# Altium PCB 电动马扎pcb.PcbDoc
Units mm, origin at the board's own origin, x right, y up, seen from the top; angles counter-clockwise.
Board outline 99 x 55 mm, 2 copper layers (Top Layer, Bottom Layer); 128 components, 85 nets, 392 pads, 455 vias.
Unrouted connection lines stored in the file: 5.
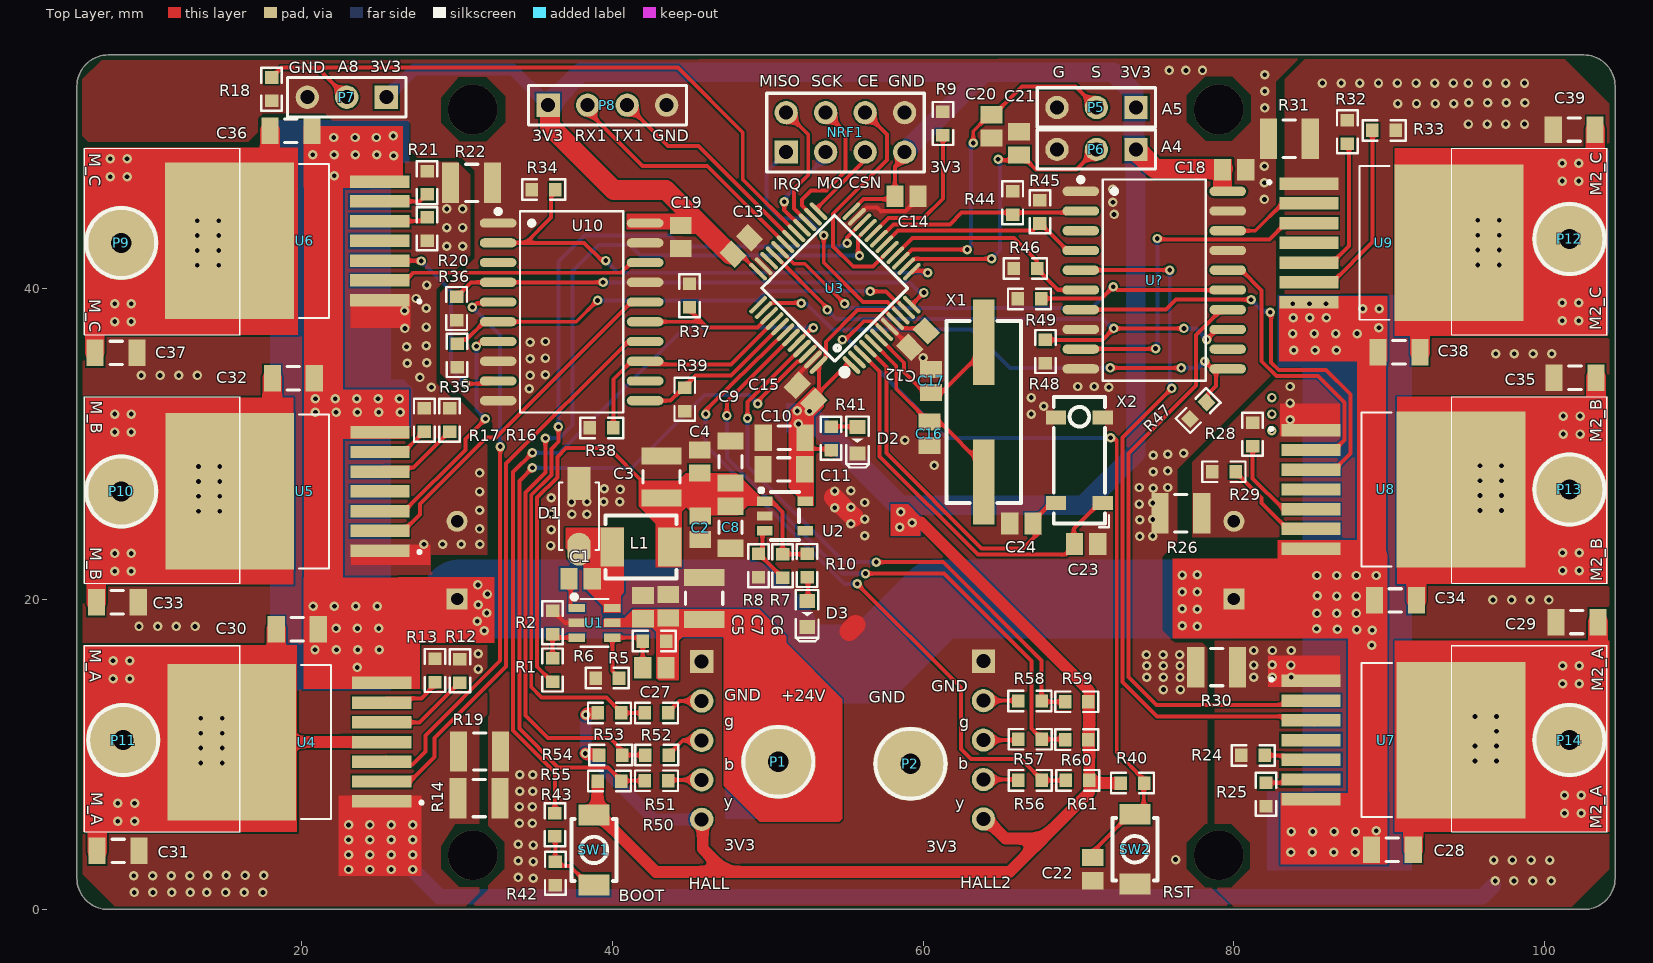
[diagram p0: Top Layer view]
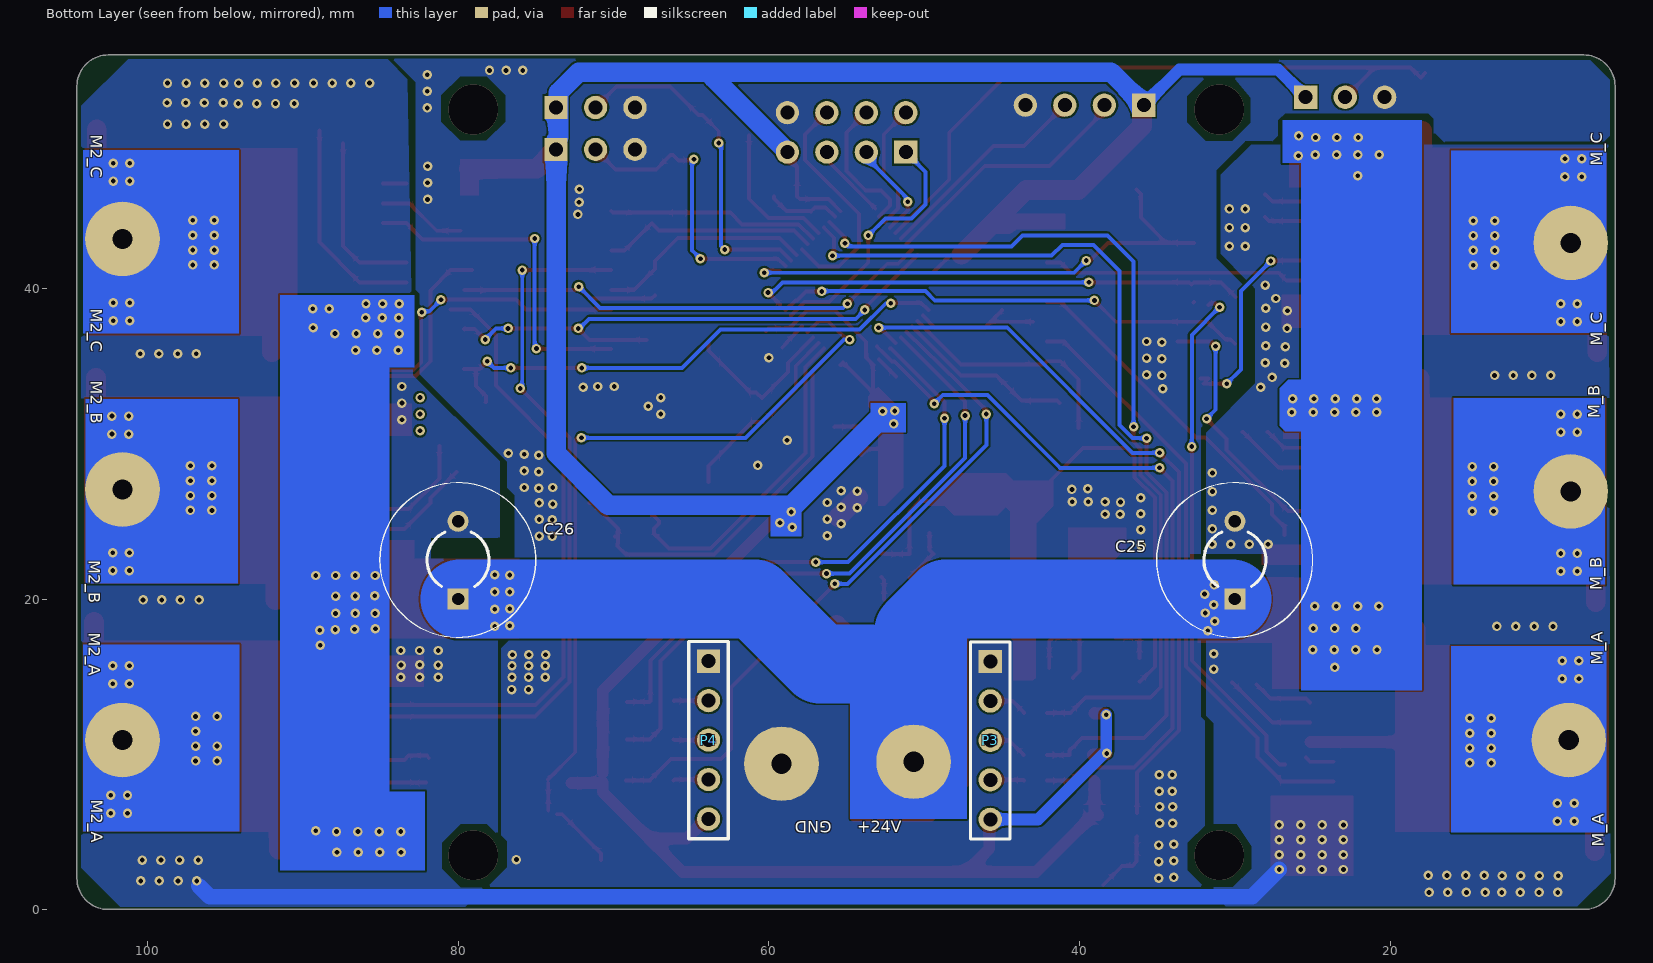
[diagram p1: Bottom Layer view, seen from below]

## Layer stack, top to bottom
Top Layer: signal copper 0.0356
Dielectric: dielectric 0.32, FR-4, Dk 4.8
Bottom Layer: signal copper 0.0356

## Board outline
5.532,2.02 ccw(c7.532,2.02) 7.532,0.02 102.532,0.02 ccw(c102.532,2.02) 104.532,2.02 104.532,53.02 ccw(c102.532,53.02) 102.532,55.02 7.532,55.02 ccw(c7.532,53.02) 5.532,53.02

## Design rules (kind name [scope] priority, off if disabled: settings)
Clearance [All] p1: gap=0.127
ComponentClearance [All] p1: gap=0 collisioncheckmode=3 verticalgap=0 showdistances=FALSE
PlaneConnect [All] p1: planeconnectstyle=Direct reliefexpansion=0.508 reliefentries=4 reliefconductorwidth=0.254 reliefairgap=0.254
PolygonConnect [All] p1: connectstyle=Direct reliefconductorwidth=0.254 reliefentries=4 polygonreliefangle="90 Angle"
RoutingVias [All] p1: holewidth=0.711 width=1.27 viastyle="Through Hole" minholewidth=0.711 minwidth=1.27 maxholewidth=0.711 maxwidth=1.27
SilkscreenOverComponentPads SilkToSolderMaskClearance [IsPad] p1: minsilkscreentomaskgap=0.254
SolderMaskExpansion [All] p1: expansion=0.102
Width [All] p1: maxlimit=7.62 minlimit=0.254 preferedwidth=0.254
25 further rules are at their usual default settings.

## Components (designator, comment, footprint, x,y, rotation, side; value= is the part's Value field where it differs from the comment)
C1 "" C0805 37.948,21.311 r180 top
C2 "" C0805 45.644,24.587 r270 top
C3 "" C1210 43.155,27.864 r270 top
C4 "" C0805 45.618,28.854 r270 top
C5 "" C0805 41.961,19.482 r90 top
C6 "" C1210 45.898,20.041 r270 top
C7 "" C0805 43.586,19.533 r270 top
C8 "" C1206 47.6,24.619 r90 top
C9 "" C1206 47.6,28.829 r270 top
C10 "" C1206 51.054,30.378 r0 top
C11 "" C1206 51.029,28.346 r0 top
C12 "10u" C0805 59.665,36.728 r45 top
C13 "0.1u" C0805 48.285,42.723 r225 top
C14 "0.1u" C0805 58.928,45.923 r180 top
C15 "0.1u" C0805 52.426,33.223 r315 top
C16 "Cap" C0805 60.401,30.632 r90 top
C17 "Cap" C0805 60.503,34.036 r270 top
C18 "0.1u" C0805 80.01,47.625 r180 top
C19 "0.1u" C0805 44.4,43.3 r90 top
C20 "" C0805 64.389,50.419 r90 top
C21 "" C0805 66.167,49.327 r270 top
C22 "" C0805 70.917,2.616 r90 top
C23 "Cap" C0805 70.485,23.546 r180 top
C24 "Cap" C0805 66.319,24.867 r0 top
C25 "Cap2" CAPR5-4X5 30,22.5 r90 bottom
C26 "Cap2" CAPR5-4X5 80,22.5 r90 bottom
C27 "" C0805 42.697,15.57 r180 top
C28 "" C1206 90.195,3.861 r180 top
C29 "" C1206 102.079,18.517 r0 top
C30 "" C1206 19.71,18.059 r0 top
C31 "" C1206 8.179,3.785 r180 top
C32 "" C1206 19.456,34.214 r0 top
C33 "" C1206 8.128,19.787 r180 top
C34 "" C1206 90.399,19.914 r180 top
C35 "" C1206 101.956,34.239 r0 top
C36 "" C1206 19.304,50.14 r0 top
C37 "" C1206 8.052,35.839 r180 top
C38 "" C1206 90.627,35.89 r180 top
C39 "" C1206 101.905,50.216 r0 top
D1 "Diode" SMA 37.846,25.324 r90 top
D2 "LED3" LED0603-GREEN 55.855,30.937 r270 top
D3 "LED3" LED0603-GREEN 52.611,19.762 r270 top
L1 "Inductor" 0420-4.7μH 39.99,23.343 r0 top
NRF1 "Header 4X2" HDR2X4 51.181,48.768 r0 top locked
P1 "P1_C4.5" P1_C4.5 50.673,9.525 r0 top
P2 "P1_C4.5" P1_C4.5 59.182,9.398 r0 top
P3 "Header 5" HDR1X5 45.745,15.977 r270 bottom
P4 "Header 5" HDR1X5 63.881,16.002 r270 bottom
P5 "Header 3" HDR1X3 73.692,51.638 r180 top
P6 "Header 3" HDR1X3 73.692,48.938 r180 top
P7 "Header 3" HDR1X3 25.44,52.3 r180 top
P8 "Header 4" HDR1X4 35.865,51.791 r0 top
P9 "P1_C4.5" P1_C4.5 8.382,42.926 r0 top
P10 "P1_C4.5" P1_C4.5 8.382,26.924 r0 top
P11 "P1_C4.5" P1_C4.5 8.509,10.922 r0 top
P12 "P1_C4.5" P1_C4.5 101.6,43.18 r0 top
P13 "P1_C4.5" P1_C4.5 101.6,27.051 r0 top
P14 "P1_C4.5" P1_C4.5 101.6,10.922 r0 top
R1 "" R0603 36.144,16.28 r270 top
R2 "" R0603 36.144,19.328 r270 top
R5 "" R0603 43.541,17.294 r180 top
R6 "" R0603 40.511,14.91 r180 top
R7 "" R0603 50.952,22.977 r270 top
R8 "" R0603 49.4,21.302 r90 top
R9 "" R0603 61.265,51.45 r270 top
R10 "" R0603 52.527,23.002 r270 top
R12 "" R0603 30.175,16.221 r270 top
R13 "" R0603 28.575,16.246 r270 top
R14 "" 14-1210 31.42,7.188 r0 top
R16 "" R0603 29.515,32.358 r270 top
R17 "" R0603 27.889,32.358 r270 top
R18 "" R0603 18.059,51.97 r90 top
R19 "" 14-1210 31.445,10.185 r0 top
R20 "" R0603 28.067,42.979 r90 top
R21 "" R0603 28.067,47.64 r270 top
R22 "" 14-1210 30.937,46.787 r0 top
R24 "" R0603 80.393,9.931 r0 top
R25 "" R0603 82.067,6.58 r90 top
R26 "" 14-1210 76.581,25.527 r180 top
R28 "" R0603 81.204,31.443 r270 top
R29 "" R0603 78.513,28.194 r0 top
R30 "" 14-1210 78.892,15.621 r180 top
R31 "" 14-1210 83.566,49.632 r180 top
R32 "" R0603 87.3,50.917 r270 top
R33 "" R0603 90.516,50.165 r180 top
R34 "" R0603 36.414,46.355 r180 top
R35 "" R0603 29.997,36.523 r270 top
R36 "" R0603 29.972,39.546 r270 top
R37 "" R0603 44.958,38.686 r90 top
R38 "" R0603 38.457,31.013 r0 top
R39 "" R0603 44.653,32.006 r90 top
R40 "" R0603 74.319,8.153 r180 top
R41 "" R0603 54.077,29.499 r90 top
R42 "" R0603 36.322,1.5 r90 top
R43 "" R0603 36.297,6.315 r270 top
R44 "" R0603 65.761,44.655 r90 top
R45 "" R0603 67.513,44.079 r90 top
R46 "" R0603 67.427,41.275 r180 top
R47 "" R0603 77.102,31.534 r45 top
R48 "" R0603 67.869,35.087 r90 top
R49 "" R0603 67.689,39.319 r180 top
R50 "" R0603 43.678,8.306 r180 top
R51 "" R0603 43.703,9.957 r180 top
R52 "" R0603 43.678,12.675 r180 top
R53 "" R0603 38.965,12.675 r0 top
R54 "" R0603 39.042,9.957 r0 top
R55 "" R0603 38.965,8.28 r0 top
R56 "" R0603 66.042,8.331 r0 top
R57 "" R0603 66.042,10.973 r0 top
R58 "" R0603 66.025,13.437 r0 top
R59 "" R0603 70.729,13.386 r180 top
R60 "" R0603 70.729,10.947 r180 top
R61 "" R0603 70.788,8.331 r180 top
SW1 "" SW-SMD_L3.9-W3.0-P4.45 38.853,1.687 r90 top
SW2 "" SW-SMD_L3.9-W3.0-P4.45 73.688,1.734 r90 top
U1 "TPMP2359DJ" MP2359 37.694,19.416 r270 top
U2 "RT9013-33GB" SOP23-5_L3.0_W1.7_P0.95_LS2.8_BR 49.787,26.26 r0 top
U3 "STM32F103C8T6" STM32F103C8T6 55.442,35.002 r45 top
U4 "BTS7960B" PG-TO263-7-1 25.1,7.042 r180 top
U5 "*" PG-TO263-7-1 24.973,23.171 r180 top
U6 "*" PG-TO263-7-1 24.965,39.3 r180 top
U7 "BTS7960B" PG-TO263-7-1 85.017,14.675 r0 top
U8 "*" PG-TO263-7-1 85.009,30.804 r0 top
U9 "*" PG-TO263-7-1 84.882,46.679 r0 top
U10 "SN74HC244DW" SOIC-20_L13.0-W7.6-P1.27-LS10.3-BL 32.606,44.126 r0 top
U? "SN74HC244DW" SOIC-20_L13.0-W7.6-P1.27-LS10.3-BL 70.111,46.175 r0 top
X1 "8MHz" HC-49S-SMD 63.754,36.449 r270 top
X2 "FR08S4-32.768-N06LLDT" OSC-SMD_4P-L8.0-W3.2-BL 71.563,26.203 r90 top

## Footprints (in the part's own frame and the unit in brackets; to place one, negate y for a bottom-side part, rotate by r counter-clockwise, add the part's x,y. Pads: shape width x height; smd on the part's side, far side on the other; paste and mask are expansions set on the pad)
14-1210 [mm] "Chip Resistor, Body 3.2x2.5mm, IPC High Density"
  rect 1.1x2.6 smd: 1(-1.35,0) 2(1.35,0)
  silkscreen extent -0.4,-1.2 0.4,1.2, body extent -1.68,-1.32 1.68,1.32, height 0.9
0420-4.7μH [mm]
  rect 1.501x2.499 smd mask+0.05: 1(0,0) 2(3.698,0)
  silkscreen extent -0.44,-2.03 4.14,2.03
C0805 [mm] "Chip Capacitor, Body 2.0x1.3mm, IPC High Density"
  rect 1.1x1.4 smd: 1(-0.75,0) 2(0.75,0)
  body extent -1.1,-0.72 1.1,0.72, height 1.4
C1206 [mm] "Chip Capacitor, Body 3.2x1.6mm, IPC High Density"
  rect 1.1x1.7 smd: 1(-1.35,0) 2(1.35,0)
  silkscreen extent -0.4,-0.75 0.4,0.75, body extent -1.7,-0.9 1.7,0.9, height 1.3
C1210 [mm] "Chip Capacitor, Body 3.2x2.5mm, IPC High Density"
  rect 1.1x2.6 smd: 1(-1.35,0) 2(1.35,0)
  silkscreen extent -0.4,-1.2 0.4,1.2, body extent -1.7,-1.35 1.7,1.35, height 1.3
CAPR5-4X5 [mm] "Capacitor; 2 Leads"
  rect 1.35x1.35 hole 0.8: 1(-2.5,0)
  round 1.35 hole 0.8: 2(2.5,0)
  silkscreen extent -1.69,-2 1.82,2
HC-49S-SMD [mm] "8Mhz晶振"
  rect 5.5x1.4 smd mask+0.051: 1(-0.083,0.14) 2(8.917,0.14)
  silkscreen extent -1.43,-2.26 10.27,2.54
HDR1X3 [mm] "Connector; Header; 3 Position"
  rect 1.5x1.5 hole 0.9: 1(0,0)
  round 1.5 hole 0.9: 2(2.54,0) 3(5.08,0)
  silkscreen extent -1.27,-1.27 6.35,1.27
HDR1X4 [mm] "Connector; Header; 4 Position"
  rect 1.5x1.5 hole 0.9: 1(0,0)
  round 1.5 hole 0.9: 2(2.54,0) 3(5.08,0) 4(7.62,0)
  silkscreen extent -1.27,-1.27 8.89,1.27
HDR1X5 [mm] "Connector; Header; 5 Position"
  rect 1.5x1.5 hole 0.9: 1(0,0)
  round 1.5 hole 0.9: 2(2.54,0) 3(5.08,0) 4(7.62,0) 5(10.16,0)
  silkscreen extent -1.27,-1.27 11.43,1.27
HDR2X4 [mm] "Connector; Header; 4x2 Position"
  rect 1.5x1.5 hole 0.9: 1(0,0)
  round 1.5 hole 0.9: 2(0,2.54) 3(2.54,0) 4(2.54,2.54) 5(5.08,0) 6(5.08,2.54) 7(7.62,0) 8(7.62,2.54)
  silkscreen extent -1.27,-1.27 8.89,3.81
LED0603-GREEN [mm] "SMT LED; 2 Flat Leads"
  rect 0.9x1 smd: 1(-0.124,-0.084) 2(1.576,-0.084)
  silkscreen extent -0.81,-0.81 2.48,0.65
MP2359 [mm] "SOT23-6"
  rect 0.532x1.072 smd mask+0.051: 1(0,0) 2(0.95,0) 3(1.9,0) 4(1.9,2.298) 5(0.95,2.298) 6(0,2.298)
  silkscreen extent -0.87,-0.3 2.49,2.04
OSC-SMD_4P-L8.0-W3.2-BL [mm] "32.769khz"
  rect 0.9x1.3 smd mask+0.051: 1(-0.016,0.008) 2(5.484,0.008) 3(5.484,3.008) 4(-0.016,3.008)
  silkscreen extent -1.58,-0.4 6.8,3.16
P1_C4.5 [mm]
  round 4.8 hole 1.3: 0(0,0)
  silkscreen extent -2.25,-2.25 2.25,2.25
PG-TO263-7-1 [mm] "BTS7960B"
  rect 3.81x0.8 smd: 1(-0.054,0.057) 2(-0.054,-1.213) 3(-0.054,-2.483) 4(-0.054,-3.753) 5(-0.054,-5.023) 6(-0.054,-6.293) 7(-0.054,-7.563)
  rect 8.29x10.07 smd paste-4.36: 8(9.606,-3.753)
  silkscreen extent -2.7,-8.7 5.15,1.2, body extent -1.55,-8.7 13.35,1.2, height 4.4
R0603 [mm]
  rect 0.806x0.864 smd mask+0.051: 1(0.092,0) 2(1.598,0)
  silkscreen extent -0.54,-0.66 2.23,0.66
SMA [mm]
  rect 2.12x1.5 smd: 1(2.115,0)
  oval 2.12x1.5 smd: 2(-2.115,0)
  silkscreen extent -2.16,-1.28 2.16,1.28
SOIC-20_L13.0-W7.6-P1.27-LS10.3-BL [mm] "74HC244DW"
  oval 2.36x0.595 smd mask+0.051: 1(0.033,0.07) 2(0.033,-1.2) 3(0.033,-2.47) 4(0.033,-3.74) 5(0.033,-5.01) 6(0.033,-6.28) 7(0.033,-7.55) 8(0.033,-8.82) 9(0.033,-10.09) 10(0.033,-11.36) 11(9.492,-11.36) 12(9.492,-10.09) 13(9.492,-8.82) 14(9.492,-7.55) 15(9.492,-6.28) 16(9.492,-5.01) 17(9.492,-3.74) 18(9.492,-2.47) 19(9.492,-1.2) 20(9.492,0.07)
  silkscreen extent -0.12,-12.12 8.08,0.97
SOP23-5_L3.0_W1.7_P0.95_LS2.8_BR [mm] "RT9013"
  rect 1x0.6 smd mask+0.051: 1(0.013,0.04) 2(0.013,-0.91) 3(0.013,-1.86) 4(2.613,-1.86) 5(2.613,0.04)
  silkscreen extent -0.34,-2.46 2.21,0.87
STM32F103C8T6 [mm]
  oval 0.27x1.5 smd mask+0.05: 1(0,0.085) 2(0.5,0.085) 3(1,0.085) 4(1.5,0.085) 5(2,0.085) 6(2.5,0.085) 7(3,0.085) 8(3.5,0.085) 9(4,0.085) 10(4.5,0.085) 11(5,0.085) 12(5.5,0.085) 25(5.5,8.585) 26(5,8.585) 27(4.5,8.585) 28(4,8.585) 29(3.5,8.585) 30(3,8.585) 31(2.5,8.585) 32(2,8.585) 33(1.5,8.585) 34(1,8.585) 35(0.5,8.585) 36(0,8.585)
  oval 1.5x0.27 smd mask+0.05: 13(7,1.585) 14(7,2.085) 15(7,2.585) 16(7,3.085) 17(7,3.585) 18(7,4.085) 19(7,4.585) 20(7,5.085) 21(7,5.585) 22(7,6.085) 23(7,6.585) 24(7,7.085) 37(-1.5,7.085) 38(-1.5,6.585) 39(-1.5,6.085) 40(-1.5,5.585) 41(-1.5,5.085) 42(-1.5,4.585) 43(-1.5,4.085) 44(-1.5,3.585) 45(-1.5,3.085) 46(-1.5,2.585) 47(-1.5,2.085) 48(-1.5,1.585)
  silkscreen extent -0.84,-0.12 6.05,7.68
SW-SMD_L3.9-W3.0-P4.45 [mm]
  rect 1.35x2 smd: 1(-0.087,0.053) 2(4.413,0.053)
  silkscreen extent 0.16,-1.4 4.16,1.5

## Part data
C1 C2 C3 C4 C5 C6 C7 C8 C9 C10 C11 C20 C21 C22 C27 C28 C29 C30 C31 C32 C33 C34 C35 C36 C37 C38 C39: library part Cap, "Capacitor"
C16 C17 C23 C24 C25 C26: "Capacitor"
D1: "Default Diode"
D2 D3: "Typical BLUE SiC LED"
NRF1: "Header, 4-Pin, Dual row"
P3 P4: "Header, 5-Pin"
P5 P6 P7: "Header, 3-Pin"
P8: "Header, 4-Pin"
R1 R2 R5 R6 R12 R13 R14 R16 R17 R19 R20 R21 R22 R24 R25 R26 R28 R29 R30 R31 R32 R33 R34 R35 R36 R37 R38 R39 R44 R45 R46 R47 R48 R49 R50 R51 R52 R53 R54 R55 R56 R57 R58 R59 R60 R61: library part Res1, "Resistor"
R7 R8 R9 R10 R18 R40 R41 R42 R43: library part Res2, "Resistor"
SW1 SW2: library part TAEF-25R-V-T/R
U4 U7: "Half Bridge Driver DC Motors, General Purpose DMOS PG-TO263-7-1"
U5 U6 U8 U9: library part BTS7960B, "Half Bridge Driver DC Motors, General Purpose DMOS PG-TO263-7-1"

## Via types
v1: diameter 0.61, hole 0.305, Top Layer to Bottom Layer, 451 vias
v2: diameter 3.2, hole 3.2, Top Layer to Bottom Layer, 4 vias

## Nets (pads, with @x,y where several pads share a name; then routed paths per layer and width w, separated by ;. In a path a pad name is that pad's centre, name@x,y a point inside that pad or via, vN(x,y) a via of type N, cw(c..) or ccw(c..) an arc to the next point about the centre after c; other vN are vias at no path point)
3V3: C10.2 C11.2 C12.2 C13.2 C14.2 C15.2 C18.2 C19.2 NRF1.7 P3.5 P4.5 P5.1 P6.1 P7.1 P8.1 R40.2 R41.1 R53.1 R54.1 R55.1 R59.1 R60.1 R61.1 SW1.2 U2.5 U3.1 U3.9 U3.24 U3.36 U3.48 U10.20 U?.20 | length 254.1
  Top Layer w0.254: U10.20 C19.2@43.704,44.196 ; C19.2@44.081,44.219 44.25,44.05 44.3,44.05 C19.2 ; C13.2@47.603,42.015 C13.2@47.709,41.909 ; C13.2@48.321,42.123 U3.36 ; 52.2,26.881 52.2,27.3 ; C10.2 52.404,30.078 52.827,29.655 53.653,29.655 54.048,29.261 R41.1@54.077,29.261 ; C15.2@52.904,33.27 C15.2@53.01,33.376 ; U3.1 55.23,35.215 53.301,33.286 53.301,35.102 U3.48 53.261,35.066 53.731,35.537 53.731,36.561 55.77,38.6 57.501,38.6 U3.9 58.681,37.42 60.033,37.42 C12.2 ; U3.24 56.163,45.742 57.997,45.742 C14.2 58.178,47.808 58.801,48.431 NRF1.7
  Top Layer w0.762: v1(38.252,10.058) 38.303,10.008 39.111,10.008 39.133,9.986 R54.1 ; v1(38.278,12.548) 38.354,12.624 39.035,12.624 39.057,12.646 R53.1 ; R55.1 39.035,8.258 39.035,6.335 SW1.2 39.125,6.1 42.787,2.438 47.295,2.438 ; C19.2@44.081,44.219 44.231,44.219 C19.2@44.3,44.15 ; C19.2@44.3,44.05 C19.2@44.3,44.15 ; P3.5 45.81,5.752 45.81,3.924 47.295,2.438 ; 46.485,43.152 46.485,43.279 ; C13.2@47.603,42.015 45.736,43.881 44.569,43.881 C19.2 C19.2@44.3,44.15 ; v1@58.7,24.5 59.117,24.917 v1(59.284,24.917) 59.868,24.917 70.688,14.097 70.688,8.81 ; P4.5 64.044,5.842 65.301,4.585 67.704,4.585 ; R40.2 70.739,8.153 70.688,8.204 70.688,7.569 67.704,4.585 ; 47.295,2.438 65.557,2.438 67.704,4.585
  Top Layer w1.27: P8.1 35.98,51.676 35.98,50.431 40.081,46.33 43.434,46.33 46.485,43.279 C13.2@47.603,42.161 ; P6.1 74.929,47.701 C18.2@79.305,47.701
  Bottom Layer w0.762: P7.1 27.217,54.077 33.579,54.077 P8.1 ; v1(38.278,12.548) 38.278,10.211 42.672,5.817 P3.5 ; v1(51.892,32.106) 58.395,25.603 v1(58.56,25.603) ; 73.54,52.4 73.54,52.6
  Bottom Layer w1.016: v1(52.68,32.08) 58.725,26.035
  Bottom Layer w1.27: P8.1 37.986,53.912 72.228,53.912 73.54,52.6 ; 58.725,26.035 70.333,26.035 73.685,29.388 73.685,49.555 73.54,49.7 73.54,52.4 ; NRF1.7 63.566,53.533
  other v1: 58.496,24.613 51.968,31.267
3V5: C2.1 C3.2 C4.2 C8.2 C9.2 L1.2 R1.2 R7.1 R10.1 U2.1 | length 30.3
  Top Layer w0.254: R1.2 36.115,14.681 35.154,15.643 35.154,26.532 36.449,27.828 36.449,29.144 37.023,29.718 39.776,29.718 41.982,27.513 41.982,26.937 42.405,26.514 C3.2 ; 49.3,26.3 U2.1@49.5,26.3 ; U2.1 50.256,26.3 50.952,25.603 R7.1 52.502,22.885 R10.1 ; R10.1@52.443,22.919 R10.1@52.756,22.919
A4: C21.2 P6.2 U3.14 | length 19.8
  Top Layer w0.254: U3.14 59.392,41.9 v1(64.4,41.9) ; v1(64.821,48.311) 64.897,48.235 65.825,48.235 C21.2 66.317,48.577 67.243,47.65 69.865,47.65 P6.2
  Bottom Layer w0.254: v1(64.4,41.9) 64.948,42.448 64.948,48.184 v1(64.821,48.311)
A5: C20.2 P5.2 U3.15 | length 22
  Top Layer w0.254: U3.15 59.279,42.494 v1(62.84,42.494) ; v1(63.221,49.352) 63.221,50.11 64.28,51.169 C20.2 64.539,51.169 66.354,52.984 69.806,52.984 P5.2
  Bottom Layer w0.254: v1(62.84,42.494) 63.068,42.723 63.068,49.2 v1(63.221,49.352)
A8: P7.2 R18.2 U3.29 | length 43.4
  Top Layer w0.254: R18.2@17.754,53.874 17.754,53.845 18.031,53.569 R18.2 18.691,54.2 20.98,54.2 ; P7.2 22.88,52.3 20.98,54.2 ; U3.29 48.387,47.007 48.387,50.038 44.225,54.2 20.98,54.2
BOOT0: R43.1 U3.44 | length 47.7
  Top Layer w0.254: v1(34.849,29.413) 33.599,28.164 33.599,11.531 36.297,8.834 R43.1 ; U3.44 52.835,37.465 v1(52.934,37.465)
  Bottom Layer w0.254: v1(34.849,29.413) 36.601,29.413 44.653,37.465 v1(52.934,37.465)
BOOT1: R9.2 U3.20 | length 9.5
  Top Layer w0.254: U3.20 57.775,44.526 60.026,44.526 61.265,45.765 R9.2
CE: NRF1.6 U3.17 | length 15.3
  Top Layer w0.254: NRF1.6 57.658,49.911 57.658,48.258 54.2,44.8 54.2,42.7 55.5,41.4 56.766,41.4 57.853,42.487 U3.17
CSN: NRF1.5 U3.25 | length 4.9
  Top Layer w0.254: U3.25@53.149,45.148 56.023,48.022 56.023,48.53 NRF1.5
GND: C2.2 C3.1 C4.1 C5.2 C6.1 C7.1 C8.1 C9.1 C10.1 C11.1 C12.1 C13.1 C14.1 C15.1 C16.1 C17.1 C18.1 C19.1 C20.1 C21.1 C22.1 C23.1 C24.1 D1.1 D2.2 D3.2 NRF1.8 P2.0 P3.1 P4.1 P5.3 P6.3 P7.3 P8.4 R2.1 R6.2 R8.1 R9.1 R14.2 R18.1 R19.2 R22.2 R26.2 R30.2 R31.2 R34.2 R35.2 R36.2 R37.2 R38.1 R39.1 R42.1 R44.2 R45.2 R46.2 R47.1 R48.1 R49.2 SW2.1 U1.2 U2.2 U3.8 U3.23 U3.35 U3.47 U10.1 U10.8 U10.10 U10.17 U10.19 U?.1 U?.8 U?.10 U?.17 U?.19 X2.2 X2.3 | length 12.4
  Top Layer w0.254: R2.1 36.173,19.236 36.943,18.466 U1.2 ; C15.1@51.822,34.33 U3.47 ; U3.23 55.74,44.608 56.344,45.212 57.023,45.212 57.277,44.958 57.288,44.969 58.874,44.969 59.678,45.773 C14.1 ; U3.8 57.857,37.533 58.833,36.557 58.833,36.5 C12.1
  Top Layer w1.27: 54.25,26.547 55.525,25.273 ; 55.238,17.932 55.643,18.338
  other v1: 34.9,2.032 33.934,2.083 34.9,3.099 33.934,3.15 76.244,3.231 34.9,4.166 33.934,4.216 34.011,5.563 34.849,5.563 34.011,6.629 34.849,6.629 34.036,7.62 34.874,7.62 34.036,8.687 34.874,8.687 75.463,14.173 76.556,14.173 74.397,14.961 75.463,14.961 76.53,14.961 74.397,15.697 75.463,15.697 76.53,15.697 74.371,16.408 75.438,16.408 76.505,16.408 36.017,23.444 73.939,24.028 74.778,24.054 56.236,24.079 36.068,24.469 55.347,24.841 73.939,25.095 74.778,25.121 56.236,25.146 37.389,25.451 38.354,25.451 36.068,25.493 54.305,25.883 55.347,25.908 73.914,26.111 74.778,26.187 56.236,26.213 37.363,26.238 38.354,26.264 39.438,26.264 40.462,26.264 36.068,26.518 54.305,26.949 55.347,26.975 40.488,27.051 39.463,27.102 74.803,27.127 73.914,27.178 75.743,27.178 74.803,28.194 75.743,28.245 60.706,28.6 74.803,29.261 75.743,29.312 76.759,29.388 58.826,30.226 66.954,31.902 67.767,32.41 66.954,32.969 34.646,33.528 71.958,33.63 69.952,33.68 71.018,33.68 34.696,34.392 35.687,34.442 34.696,35.458 35.687,35.509 59.995,35.535 34.696,36.525 35.687,36.576 72.288,44.755 72.212,45.542 81.966,45.72 72.187,46.38 81.966,46.787 81.966,47.854 81.991,51.613 81.991,52.68 81.991,53.746 75.844,54.026 76.911,54.026 77.978,54.026
hall2_b: R57.2 R60.2 U3.43 | length 41.3
  Top Layer w0.254: v1(47.366,31.811) 47.366,32.703 U3.43 ; v1(56.286,21.641) 61.341,21.641 66.966,16.016 66.966,11.676 67.64,11.002 R57.2 69.105,10.973 R60.2
  Bottom Layer w0.254: v1(47.366,31.811) 47.366,29.088 54.813,21.641 v1(56.286,21.641)
hall2_g: R58.2 R59.2 U3.45 | length 37.3
  Top Layer w0.254: v1(48.691,31.632) 48.691,32.692 52.122,36.123 U3.45 ; v1(56.972,22.377) 61.29,22.377 67.623,16.045 R58.2 67.674,13.386 R59.2
  Bottom Layer w0.254: v1(48.691,31.632) 48.691,28.575 54.889,22.377 v1(56.972,22.377)
hall2_y: R56.2 R61.2 U3.42 | length 43.9
  Top Layer w0.254: v1(45.999,31.908) 45.999,32.143 47.8,33.944 U3.42 ; v1(55.753,20.98) 62.433,14.3 62.433,10.338 63.068,9.703 66.297,9.703 67.64,8.36 R56.2 R61.2
  Bottom Layer w0.254: v1(45.999,31.908) 45.999,29.916 54.935,20.98 v1(55.753,20.98)
hall_b: R51.2 R54.2 U3.21 | length 60.9
  Top Layer w0.254: v1(35.687,30.353) 35.687,28.143 34.392,26.848 34.392,12.497 35.839,11.049 39.827,11.049 40.64,10.236 R54.2 R51.2 ; v1(55.9,42.1) 55.8,42.2 55.8,43.254 56.443,43.897 U3.21
  Bottom Layer w0.254: v1(35.687,30.353) 36.579,30.353 37.414,31.188 37.414,41.114 39.1,42.8 41.1,42.8 41.8,42.1 v1(55.9,42.1)
hall_g: R52.2 R53.2 U3.22 | length 57.5
  Top Layer w0.254: v1(36.525,31.09) 36.525,30.124 36.068,29.667 36.068,27.985 34.773,26.69 34.773,14.326 35.436,13.662 39.605,13.662 40.564,12.703 R53.2 R52.2 ; v1(55.1,42.9) 55.1,43.265 U3.22
  Bottom Layer w0.254: v1(36.525,31.09) 36.525,41.725 38.2,43.4 43.675,43.4 44.375,42.7 54.9,42.7 v1(55.1,42.9)
hall_y: R50.2 R55.2 U3.46 | length 48.6
  Top Layer w0.254: v1(34.849,28.448) 34.011,27.61 34.011,11.659 36.5,9.169 39.704,9.169 40.564,8.309 R55.2 40.589,8.306 R50.2 ; v1(49.357,32.568) 49.357,32.741 51.915,35.299 52.079,35.299 52.55,35.769 U3.46 52.558,35.769 53.029,36.24 U3.46@53.029,36.258
  Bottom Layer w0.254: v1(34.849,28.448) 41.25,28.448 45.923,33.122 48.803,33.122 v1(49.357,32.568)
I2_U: R49.1 U3.32 U?.15 | length 36.3
  Top Layer w0.254: U3.32 51.693,41.58 52.375,41.58 v1(54.94,39.014) ; R49.1@67.335,39.548 67.54,39.343 71.474,39.343 v1(72.238,40.107) 72.466,39.878 79.586,39.878 U?.15
  Bottom Layer w0.254: v1(54.94,39.014) 55.213,38.741 70.867,38.741 72.233,40.107 v1(72.238,40.107)
I2_V: R48.2 U3.33 U?.13 | length 36.7
  Top Layer w0.254: U3.33 53.891,38.675 v1(53.823,38.607) ; R48.2 71.535,36.686 v1(72.263,37.414) v1(76.784,37.414) ; v1(78.257,36.703) 78.926,37.372 U?.13@79.586,37.372 ; U?.13@79.544,37.414 U?.13@79.586,37.372 ; U?.13@79.586,37.372 79.62,37.372 U?.13 U?.13@79.586,37.372
  Bottom Layer w0.254: v1(53.823,38.607) 54.405,38.024 71.574,38.024 72.183,37.414 v1(72.263,37.414) ; v1(76.784,37.414) 77.546,37.414 v1(78.257,36.703)
I2_W: R47.2 U3.38 U?.11 | length 35.3
  Top Layer w0.254: U3.38 50.196,39.068 52.122,39.068 v1(52.151,39.039) ; v1(72.034,34.874) v1(76.606,34.874) ; v1(78.13,35.306) 78.63,34.806 U?.11@78.997,34.806 ; R47.2 78.212,32.685 78.212,33.075 78.848,33.711 78.848,34.657 U?.11@78.997,34.806 ; U?.11@78.997,34.806 79.005,34.815 U?.11 79.612,34.806 U?.11@78.997,34.806
  Bottom Layer w0.254: v1(52.151,39.039) 52.461,39.039 54.159,37.341 63.116,37.341 65.583,34.874 v1(72.034,34.874) ; v1(76.606,34.874) 77.699,34.874 v1(78.13,35.306)
I_U: R37.1 U3.39 U10.15 | length 8.6
  Top Layer w0.254: U10.15@42.981,37.846 45.734,37.846 ; R37.1@45.001,38.608 45.001,38.579 45.734,37.846 ; U3.39 49.325,37.49 46.09,37.49 45.734,37.846
I_V: R38.2 U3.40 U10.13 | length 15.2
  Top Layer w0.254: R38.2 40.056,34.145 41.216,35.306 U10.13 42.305,35.1 47.642,35.1 U3.40
I_W: R39.2 U3.41 U10.11 | length 11.5
  Top Layer w0.254: U10.11@41.297,32.608 41.455,32.766 U10.11 43.731,32.766 44.475,33.511 45.352,34.388 47.637,34.388 U3.41
INH2_U: U7.3 U?.5 | length 47
  Top Layer w0.254: U?.5 70.148,41.169 75.865,41.169 v1(75.87,41.173) ; v1(75.997,33.553) 72.84,30.396 72.84,14.663 75.057,12.446 84.633,12.446 U7.3@85.141,11.938
  Bottom Layer w0.254: v1(75.87,41.173) 75.87,33.68 v1(75.997,33.553)
INH2_V: U8.3 U?.7 | length 28.8
  Top Layer w0.254: U?.7 75.633,38.625 76.276,39.268 v1(81.102,39.268) ; v1(82.347,38.456) 82.4,38.402 82.4,35.233 82.886,34.747 85.928,34.747 87.495,33.18 87.495,29.356 86.46,28.321 U8.3
  Bottom Layer w0.254: v1(81.102,39.268) 81.847,38.524 82.279,38.524 v1(82.347,38.456)
INH2_W: U9.3 U?.9 | length 22.2
  Top Layer w0.254: U?.9 70.16,36.102 74.938,36.102 v1(74.955,36.119) ; v1(75.07,43.205) 75.122,43.153 82.28,43.153 83.323,44.196 U9.3
  Bottom Layer w0.254: v1(74.955,36.119) 75.07,36.233 v1(75.07,43.205)
INH_U: U4.3 U10.5 | length 35.7
  Top Layer w0.254: U4.3@23.649,9.525 U4.3 U4.3@25.427,9.798 ; U4.3@26.781,9.338 27.118,9.338 27.965,10.185 27.965,11.218 32.774,16.027 v1(32.774,29.812) ; v1(30.988,38.786) 31.235,39.033 U10.5@31.616,39.033 ; U10.5@31.608,39.04 U10.5@31.616,39.033 ; U10.5@31.71,38.938 U10.5@31.616,39.033 ; U10.5 U10.5@32.655,39.1
  Bottom Layer w0.254: v1(30.988,38.786) 32.774,37 v1(32.774,29.812)
INH_V: U5.3 U10.7 | length 17.2
  Top Layer w0.254: U5.3 26.594,25.654 30.531,29.591 30.531,30.302 v1(31.826,31.598) ; v1(31.242,36.271) 31.547,36.576 U10.7 U10.7@33.706,36.576
  Bottom Layer w0.254: v1(31.242,36.271) 31.242,32.182 v1(31.826,31.598)
INH_W: U6.3 U10.9 | length 14.3
  Top Layer w0.254: U6.3 27.661,41.783 v1(27.686,41.758) ; v1(30.531,33.858) 32.027,33.858 31.685,34.2 U10.9@32.221,34.2
  Bottom Layer w0.254: v1(27.686,41.758) 29.616,39.827 29.616,34.773 v1(30.531,33.858)
IRQ: NRF1.1 U3.10 | length 16.5
  Top Layer w0.254: v1(53.6,43.4) 53.6,41.65 56.134,39.116 57.692,39.116 U3.10
  Bottom Layer w0.254: NRF1.1 49.911,47.498 49.911,45.4 50.811,44.5 52.5,44.5 v1(53.6,43.4)
M2_A: C28.1 C29.2 P14.0 U7.4 U7.8 | length 18.7
  Top Layer w1.27: U7.8@90.995,15.44 94.623,11.812 U7.8 ; C28.1 91.545,7.844 U7.8 ; U7.8@95.195,11.494 U7.8 ; 103.403,15.037 103.429,15.062 C29.2
  other v1: 101.278,6.21 102.354,6.21 101.278,7.366 102.354,7.366 95.517,9.576 96.895,9.576 95.517,10.533 96.895,10.533 96.895,11.489 95.517,12.446 96.895,12.446 101.151,14.541 102.227,14.541 101.151,15.697 102.227,15.697
M2_B: C34.1 C35.2 P13.0 U8.4 U8.8 | length 13
  Top Layer w1.27: C34.1 91.749,24.185 U8.8 U8.8@93.671,27.995 ; C35.2 103.306,31.111 103.429,30.988
  other v1: 101.151,21.831 102.227,21.831 101.151,22.987 102.227,22.987 95.847,25.705 97.225,25.705 95.847,26.662 97.225,26.662 95.847,27.618 97.225,27.618 95.847,28.575 97.225,28.575 101.202,30.62 102.277,30.62 101.202,31.775 102.277,31.775
M2_C: C38.1 C39.2 P12.0 U9.4 U9.8 | length 11.7
  Top Layer w1.27: 91.02,48.387 91.046,48.362 91.211,48.362 ; C38.1 91.977,40.415 U9.8 ; 103.2,46.838 103.255,46.892 C39.2
  other v1: 101.126,37.909 102.201,37.909 101.126,39.065 102.201,39.065 95.694,41.504 97.072,41.504 95.694,42.46 97.072,42.46 95.694,43.417 97.072,43.417 95.694,44.374 97.072,44.374 101.126,46.901 102.201,46.901 101.126,48.057 102.201,48.057
M_A: C30.1 C31.2 P11.0 U4.4 U4.8 | length 26.4
  Top Layer w0.762: U4.8 U4.4
  Top Layer w1.27: C31.2 6.829,6.88 7.01,7.061 ; C30.1@18.364,18.059 18.364,13.665 U4.8 U4.8@19.004,7.285
  other v1: 8.162,5.702 9.237,5.702 8.162,6.858 9.237,6.858 13.5,9.449 14.878,9.449 13.5,10.406 14.878,10.406 13.5,11.362 14.878,11.362 13.5,12.319 14.878,12.319 7.857,14.872 8.932,14.872 7.857,16.027 8.932,16.027
M_B: C32.1 C33.2 P10.0 U5.4 U5.8 | length 13.9
  Top Layer w1.27: C33.2 6.778,22.805 7.087,23.114 ; U5.8@16.819,25.472 U5.8 18.106,29.663 C32.1
  other v1: 7.959,21.78 9.034,21.78 7.959,22.936 9.034,22.936 13.348,25.654 14.726,25.654 13.348,26.611 14.726,26.611 13.348,27.567 14.726,27.567 13.348,28.524 14.726,28.524 7.959,30.747 9.034,30.747 7.959,31.902 9.034,31.902
M_C: C36.1 C37.2 P9.0 U6.4 U6.8 | length 17.6
  Top Layer w1.27: C37.2@6.68,35.894 6.68,39.04 6.833,39.192 ; 11.049,38.743 U6.8 17.954,45.648 C36.1
  other v1: 7.959,37.859 9.034,37.859 7.959,39.014 9.034,39.014 13.271,41.478 14.649,41.478 13.271,42.435 14.649,42.435 13.271,43.392 14.649,43.392 13.271,44.348 14.649,44.348 7.679,47.18 8.755,47.18 7.679,48.336 8.755,48.336
MISO: NRF1.2 U3.27 | length 8.4
  Top Layer w0.254: NRF1.2 52.6,49.889 52.6,47.3 51.689,46.389 51.689,45.124 52.554,44.259 U3.27
MOSI: NRF1.3 U3.28 | length 6.4
  Top Layer w0.254: v1(51.054,45.568) 51.054,45.047 U3.28
  Bottom Layer w0.254: v1(51.054,45.568) 51.054,45.754 53.721,48.421 NRF1.3
NetC1_1: C1.1 D1.2 L1.1 U1.6
NetC1_2: C1.2 U1.1 | length 2.6
  Top Layer w0.254: C1.2@37.147,21.387 37.147,21.237 37.31,21.073 37.31,19.799 37.31,19.416 U1.1@37.54,19.416 ; U1.1@37.401,19.555 U1.1@37.54,19.416 ; U1.1 U1.1@37.54,19.416
NetC16_2: C16.2 U3.5 X1.2 | length 11.9
  Top Layer w0.254: U3.5 58.268,35.005 58.268,33.516 C16.2@60.109,31.674 ; C16.2 61.074,31.382 63.894,28.562 X1.2
NetC17_2: C17.2 U3.6 X1.1 | length 10.5
  Top Layer w0.254: U3.6 57.154,36.83 58.778,35.207 58.778,34.605 60.452,32.93 60.821,33.299 61.189,33.299 63.894,36.005 X1.1
NetC27_2: C27.2 R5.2 R6.1 U1.4 | length 6.6
  Top Layer w0.254: R6.1 40.42,14.939 39.992,15.366 U1.4 41.72,17.516 R5.2 41.947,17.289 C27.2
NetD2_1: D2.1 R41.2 | length 1.7
  Top Layer w0.254: R41.2 55.734,31.098 D2.1
NetD3_1: D3.1 R10.2 | length 1.5
  Top Layer w0.254: D3.1@52.584,19.963 52.584,21.241 R10.2@52.756,21.412
NetP3_2: P3.2 R52.1 | length 2.5
  Top Layer w0.254: R52.1 43.586,12.703 44.32,13.437 P3.2
NetP3_3: P3.3 R51.1 | length 2.5
  Top Layer w0.254: R51.1 43.612,9.986 44.523,10.897 P3.3
NetP3_4: P3.4 R50.1 | length 2.2
  Top Layer w0.254: R50.1 43.637,8.357 P3.4
NetP4_2: P4.2 R58.1 | length 2.2
  Top Layer w0.254: P4.2 66.091,13.462 R58.1
NetP4_3: P4.3 R57.1 | length 2.3
  Top Layer w0.254: P4.3 66.083,10.922 R57.1
NetP4_4: P4.4 R56.1 | length 2.3
  Top Layer w0.254: P4.4 66.083,8.382 R56.1
NetR1_1: R1.1 R2.2 U1.3 | length 3.2
  Top Layer w0.254: R1.1 R2.2 36.358,17.516 U1.3
NetR7_2: R7.2 R8.2 U2.3 | length 3.7
  Top Layer w0.254: U2.3@49.657,24.257 49.657,23.157 R8.2 49.429,22.9 50.647,21.681 50.647,21.655 50.924,21.379 R7.2
NetR12_2: R12.2 U4.5 | length 6.1
  Top Layer w0.254: U4.5 27.589,12.065 30.146,14.622 R12.2
NetR13_2: R13.2 U4.6 | length 4
  Top Layer w0.254: U4.6 25.427,13.608 27.702,13.608 28.597,14.503 R13.2@28.626,14.503
NetR16_2: R16.2 U5.5 | length 5.6
  Top Layer w0.254: U5.5 25.3,28.467 27.194,28.467 29.486,30.759 R16.2
NetR17_2: R17.2 U5.6 | length 3.4
  Top Layer w0.254: U5.6 25.3,29.737 26.838,29.737 27.86,30.759 R17.2
NetR20_2: R20.2 U6.5 | length 3.5
  Top Layer w0.254: U6.5@25.278,44.064 U6.5 27.813,44.323 R20.2
NetR21_2: R21.2 U6.6 | length 3.2
  Top Layer w0.254: U6.6 27.589,45.593 28.038,46.042 R21.2
NetR24_2: R24.2 U7.5 | length 3.1
  Top Layer w0.254: R24.2 83.179,9.931 83.458,9.652 U7.5
NetR25_2: R25.2 U7.6 | length 3
  Top Layer w0.254: R25.2 84.76,8.179 U7.6
NetR28_2: R28.2 U8.5 | length 7
  Top Layer w0.254: R28.2 81.204,27.762 83.185,25.781 U8.5 U8.5@84.682,26.054
NetR29_2: R29.2 U8.6 | length 6.6
  Top Layer w0.254: R29.2 80.112,28.165 81.782,26.494 81.782,26.179 83.45,24.511 U8.6
NetR32_2: R32.2 U9.5 | length 11.1
  Top Layer w0.254: U9.5@83.323,41.656 U9.5 86.333,41.656 87.401,42.724 R32.2@87.401,49.319
NetR33_2: R33.2 U9.6 | length 13.9
  Top Layer w0.254: U9.6@83.323,40.386 U9.6 86.333,40.386 88.917,42.97 R33.2
NetR42_2: R42.2 R43.2 SW1.1 | length 4.4
  Top Layer w0.254: R43.2 36.322,4.691 R42.2 36.598,2.823 37.252,2.823 SW1.1@38.475,1.6
OS32_IN: C23.2 U3.3 X2.1 | length 26.1
  Top Layer w0.254: U3.3 56.089,35.765 57.201,34.653 57.201,29.185 63.525,22.86 69.199,22.86 69.735,23.396 C23.2 69.698,23.583 69.698,24.53 71.355,26.187 X2.1 ; C23.2@69.91,24.028 C23.2@69.916,24.028
OS32_OUT: C24.2 U3.4 X2.4 | length 22.8
  Top Layer w0.254: U3.4 56.443,36.119 57.633,34.929 57.633,29.388 63.754,23.266 66.434,23.266 67.386,24.218 67.386,24.55 C24.2 67.069,25.017 67.917,25.864 68.232,25.864 X2.4
P2_U: R46.1 U3.16 U?.6 | length 14.1
  Top Layer w0.254: U3.16 59.308,43.231 65.862,43.231 67.335,41.758 R46.1 67.335,41.246 68.687,39.895 U?.6
P2_V: R45.1 U3.18 U?.4 | length 13.9
  Top Layer w0.254: U3.18 58.377,43.714 66.421,43.714 67.056,43.713 R45.1 67.542,44.171 69.278,42.435 U?.4
P2_W: R44.1 U3.19 U?.2 | length 13.7
  Top Layer w0.254: U3.19 58.076,44.12 61.724,44.12 62.475,44.871 66.001,44.871 70.039,44.871 U?.2
P_U: R35.1 U3.11 U10.6 | length 30.8
  Top Layer w0.254: R35.1 30.274,36.708 30.618,36.708 31.757,37.846 U10.6 37.668,37.846 v1(39.04,39.218) ; v1(56.6,39.8) 57.609,39.8 58.181,39.228 58.288,39.228 U3.11
  Bottom Layer w0.254: v1(39.04,39.218) 49.318,39.218 49.927,39.827 56.573,39.827 v1(56.6,39.8)
P_V: R36.1 U3.12 U10.4 | length 32
  Top Layer w0.254: R36.1 30.904,40.386 U10.4 32.791,40.234 32.944,40.386 v1(39.395,40.386) ; U3.12 v1(60.046,39.726)
  Bottom Layer w0.254: v1(39.395,40.386) 59.114,40.386 59.774,39.726 v1(60.046,39.726)
P_W: R34.1 U3.13 U10.2 | length 33.8
  Top Layer w0.254: U10.2 34.417,42.926 ; R34.1 36.046,46.079 36.046,44.555 34.417,42.926 ; v1(39.573,41.783) 39.317,41.783 38.174,42.926 34.417,42.926 ; U3.13 59.323,41.124 60.176,41.124 v1(60.3,41)
  Bottom Layer w0.254: v1(39.573,41.783) 40.356,41 v1(60.3,41)
PGND: C25.2 C26.2 C29.1 C31.1 C33.1 C35.1 C37.1 C39.1 R12.1 R13.1 R14.1 R16.1 R17.1 R19.1 R20.1 R21.1 R22.1 R24.1 R25.1 R26.1 R28.1 R29.1 R30.1 R31.1 R32.1 R33.1 U4.1 U5.1 U6.1 U7.1 U8.1 U9.1 | length 72.1
  Top Layer w0.254: U9.1@83.323,46.736 U9.1
  Bottom Layer w1.016: v1(27.146,2.591) 28.899,0.838 95.987,0.838 96.698,1.549
  other v1: 9.22,1.118 10.422,1.118 11.625,1.118 12.827,1.118 13.894,1.118 15.096,1.118 16.298,1.118 17.501,1.118 96.825,1.854 98.027,1.854 99.229,1.854 100.432,1.854 9.195,2.184 10.397,2.184 11.599,2.184 12.802,2.184 13.945,2.21 15.147,2.21 16.349,2.21 17.551,2.21 23.012,2.591 24.39,2.591 25.768,2.591 96.723,3.2 97.925,3.2 99.128,3.2 100.33,3.2 23.012,3.548 24.39,3.548 25.768,3.548 27.146,3.548 23.012,4.504 24.39,4.504 25.768,4.504 27.146,4.504 23.012,5.461 24.39,5.461 25.768,5.461 27.146,5.461 81.28,14.961 82.482,14.961 83.685,14.961 31.369,15.494 81.28,15.748 83.668,15.748 82.474,15.773 31.369,16.485 81.28,16.688 82.482,16.688 83.685,16.688 9.525,18.237 10.727,18.237 11.93,18.237 13.132,18.237 96.672,19.939 97.875,19.939 99.077,19.939 100.279,19.939 27.864,23.52 29.066,23.52 30.268,23.52 31.471,23.52 31.445,24.511 31.445,25.713 31.445,26.916 31.445,28.118 83.617,31.547 83.617,32.614 28.346,33.63 83.617,33.68 27.61,34.265 9.677,34.392 10.88,34.392 12.082,34.392 13.284,34.392 26.797,35.179 28.042,35.204 96.85,35.789 98.052,35.789 99.255,35.789 100.457,35.789 26.746,36.246 28.016,36.305 26.645,37.414 28.016,37.507 26.619,38.557 28.016,38.71 27.356,39.345 28.042,40.208 29.337,42.706 30.353,42.706 29.337,43.908 30.353,43.908 29.337,45.11 30.353,45.11 95.098,50.571 96.3,50.571 97.502,50.571 98.704,50.571 90.551,51.892 91.753,51.892 92.956,51.892 94.158,51.892 95.123,51.943 96.325,51.943 97.528,51.943 98.73,51.943 85.7,53.213 86.902,53.213 88.104,53.213 89.306,53.213 90.526,53.213 91.728,53.213 92.93,53.213 94.132,53.213 95.098,53.213 96.3,53.213 97.502,53.213 98.704,53.213
PWM2_U: U7.2 U?.14 | length 40
  Top Layer w0.254: U?.14@80.486,38.625 U?.14 79.211,38.625 77.572,36.986 77.572,33.731 73.221,29.38 73.221,14.993 75.025,13.189 84.69,13.189 U7.2
PWM2_V: U8.2 U?.16 | length 19.1
  Top Layer w0.254: U?.16@79.091,41.169 80.481,41.169 81.788,39.862 81.788,35.306 82.728,34.366 85.398,34.366 87.114,32.651 87.114,30.245 86.46,29.591 U8.2
PWM2_W: U9.2 U?.18 | length 5.7
  Top Layer w0.254: U?.18@79.858,43.705 81.373,43.705 83.134,45.466 U9.2
PWM_U: U4.2 U10.14 | length 38.5
  Top Layer w0.254: U4.2@23.649,8.255 U4.2 26.975,8.255 28.55,9.83 28.55,11.049 33.155,15.654 33.155,28.71 41.021,36.576 U10.14
PWM_V: U5.2 U10.16 | length 22.2
  Top Layer w0.254: U5.2@26.805,24.111 26.797,24.119 26.797,24.649 27.6,25.452 27.6,26.121 31.882,30.404 32.504,30.404 41.216,39.116 U10.16
PWM_W: U6.2 U10.18 | length 17.6
  Top Layer w0.254: U6.2 26.695,40.513 27.182,41 40.56,41 41.216,41.656 U10.18
RST: C22.2 R40.1 SW2.2 U3.7 | length 52.5
  Top Layer w0.254: v1(54.8,36.7) 55,36.7 56.18,37.88 56.807,37.88 U3.7 ; C22.2@70.79,3.188 70.79,3.627 73.31,6.147 SW2.2 ; v1(72.06,30.378) 72.263,30.378 72.459,30.183 72.459,10.139 R40.1@74.219,8.379 ; SW2.2@74.197,6.388 R40.1@74.197,8.148
  Bottom Layer w0.254: v1(54.8,36.7) 55.172,36.7 61.493,30.378 v1(72.06,30.378)
RX1: P8.2 U3.31 | length 16.7
  Top Layer w0.254: P8.2 38.405,51.41 41.935,47.879 46.101,47.879 U3.31
SCK: NRF1.4 U3.26 | length 9.3
  Top Layer w0.254: U3.26 52.197,45.318 52.197,45.71 52.787,46.3 53.762,46.3 55,47.538 55,50.029 NRF1.4
TX1: P8.3 U3.30 | length 14.1
  Top Layer w0.254: P8.3 43.586,49.149 45.538,49.149 U3.30
VM: C5.1 C6.2 C7.2 C25.1 C26.1 C27.1 C28.2 C30.2 C32.2 C34.2 C36.2 C38.2 P1.0 R5.1 U1.5 U4.7 U5.7 U6.7 U7.7 U8.7 U9.7 | length 124.8
  Top Layer w1.27: U8.7@85.082,23.114 88.156,23.114 88.6,22.67 88.722,22.548 ; U7.7@85.198,6.877 88.03,6.877
  Top Layer w2.54: v1@23.368,15.621 22.241,16.748 21.4,17.589 21.4,19.533 21.4,34.214 21.4,47.6 21.7,47.9 21.867,47.733 22.098,47.733 24.384,47.733 ; 25.154,15.475 25.475,15.475 ; 85.5,38.1 v1(85.954,38.1) 86.9,38.1 88.433,36.567 ; 88.6,6.3 88.6,19.914 88.6,21.514 88.6,22.67
  Bottom Layer w5.08: C25.1@30.194,20 32.08,20 32.131,20 48.631,20 50.673,17.958 50.673,13.005 ; P1.0 50.673,13.005 ; C26.1@79.883,20 60.894,20 56.718,15.824 53.492,15.824 50.673,13.005
  other v1: 83.668,3.708 85.046,3.708 86.423,3.708 87.801,3.708 83.693,5.029 85.071,5.029 86.449,5.029 87.827,5.029 89.154,5.08 23.571,15.596 20.853,16.739 22.231,16.739 23.609,16.739 24.987,16.739 88.875,17.018 31.75,17.958 88.9,17.983 87.909,18.034 86.665,18.059 85.319,18.085 22.206,18.11 23.584,18.11 24.962,18.11 77.648,18.237 76.683,18.288 31.293,18.567 85.344,19.075 86.614,19.075 87.884,19.075 31.902,19.101 77.648,19.346 76.683,19.372 20.726,19.533 22.104,19.533 23.482,19.533 24.86,19.533 31.369,19.634 86.614,20.193 87.884,20.193 85.369,20.218 31.953,20.32 76.683,20.455 77.648,20.455 31.344,20.904 85.344,21.514 86.614,21.514 87.884,21.514 89.154,21.514 76.683,21.539 77.648,21.565 20.879,32.029 22.206,32.029 23.584,32.029 24.962,32.029 26.34,32.029 20.879,32.893 22.155,32.893 23.533,32.893 24.911,32.893 26.289,32.893 83.845,36.017 85.223,36.017 86.601,36.017 83.795,37.084 85.173,37.084 86.55,37.084 87.928,37.084 89.332,37.465 83.82,38.1 84.887,38.1 88.29,38.684 89.357,38.684 83.795,39.014 84.861,39.014 85.928,39.014 22.098,47.244 25.908,48.539 20.701,48.59 22.079,48.59 23.457,48.59 24.835,48.59 22.054,49.708 23.431,49.708 24.809,49.708 25.883,49.809
pads on no net: U2.4 U3.2 U3.34 U3.37 U10.3 U10.12 U?.3 U?.12
copper on no net:
  other v1: 78.378,3.231 82.448,30.836 82.448,31.902 82.448,32.969
  other v2: 31.013,3.505 79.019,3.505 31.013,51.511 79.019,51.511

## Polygon pours and split planes (outlines as drawn)
no net on Top Layer "NONET_L01_P038" (solid, remove dead copper, pour order 38): 7.468,54.635
PGND on Top Layer "PGND_L01_P014" (solid, remove dead copper, pour order 14): 84.557,54.737 101.295,54.737 104.165,51.867 104.165,2.616 101.752,0.203 79.985,0.203 78.765,1.422 78.765,22.504 77.318,23.952 77.318,28.804 83.287,34.773 83.287,53.467
PGND on Top Layer "PGND_L01_P024" (solid, remove dead copper, pour order 24): 5.893,48.133 30.023,48.133 30.861,47.295 30.861,42.139 28.651,39.929 28.651,33.9 29.607,32.944 29.997,32.944 31.953,30.988 31.953,12.573 31.42,12.04 31.42,1.092 30.556,0.229 7.976,0.229 5.918,2.286 5.893,2.286
GND on Top Layer "GND_L01_P032" (solid, remove dead copper, pour order 32): 35.163,47.32 31.369,47.32 31.369,42.164 28.905,39.7 28.905,34.569 29.032,34.442 32.182,31.293 32.436,31.293 40.56,39.417 40.56,43.079
GND on Top Layer "GND_L01_P040" (solid, remove dead copper, pour order 40): 7.112,54.686 5.867,53.442 5.867,49.835 6.274,49.428 16.561,49.428 17.17,50.038 17.17,50.927 17.501,51.257 21.514,51.257 21.996,50.775 26.822,50.775 27,50.597 27,48.87 27.457,48.412 30.302,48.412 31.14,47.574 31.14,41.935 28.931,39.726 28.931,34.544 32.182,31.293 32.309,31.293 32.309,23.165 32.893,22.581 32.893,15.011 32.004,14.122 32.004,1.295 30.963,0.254 79.705,0.254 78.283,1.676 78.283,16.866 77.978,17.17 76.2,17.17 75.387,17.983 75.387,22.708 76.352,23.673 76.352,28.346 82.702,34.696 82.702,53.289 84.226,54.813
PGND on Bottom Layer "PGND_L02_P022" (solid, remove dead copper, pour order 22): 80.337,31.874 77.318,28.854 77.318,23.978 80.614,23.978
PGND on Bottom Layer "PGND_L02_P020" (solid, remove dead copper, pour order 20): 83.261,53.467 84.531,54.737 101.244,54.737 104.242,51.74 104.242,2.692 101.752,0.203 79.527,0.203 77.445,2.286 77.445,28.931 82.906,34.392
PGND on Bottom Layer "PGND_L02_P026" (solid, remove dead copper, pour order 26): 5.97,49.251 28.956,49.251 30.912,47.295 30.912,42.215 28.677,39.98 28.677,33.874 31.852,30.699 31.852,12.497 31.369,12.014 31.369,1.016 30.582,0.229 7.95,0.229 5.818,2.361
GND on Bottom Layer "GND_L02_P042" (solid, remove dead copper, pour order 42): 7.137,54.686 5.867,53.416 5.867,49.809 6.223,49.454 16.459,49.454 16.51,49.403 17.094,49.987 17.196,49.987 17.196,50.927 17.551,51.283 26.772,51.283 27.229,50.825 27.229,49.835 27.61,49.454 27.661,49.505 29.362,49.505 29.362,49.428 31.191,47.6 31.191,41.935 28.905,39.649 28.905,34.061 29.159,34.061 32.207,31.013 32.207,12.421 31.953,12.167 31.953,5.423 33.071,4.305 33.071,2.54 30.785,0.254 79.324,0.254 76.835,2.743 76.835,4.394 77.216,4.801 77.216,5.221 77.216,16.84 76.352,17.704 76.352,26.695 76.835,27.178 76.835,28.829 82.474,34.468 82.474,39.649 82.728,39.903 82.728,53.264 84.252,54.788

## Other copper
Top Layer:
  rectangle net VM: 20.1,46.5 26.518,50.444
  rectangle net VM: 21.2,30.3 26.9,33.5
  rectangle net VM: 20.1,14.2 27.6,21.4
  rectangle net VM: 26.2,17.17 32.41,21.412
  rectangle net VM: 76.048,17.45 89.9,22.606
  rectangle net VM: 82.8,20.5 88.9,23.8
  rectangle net VM: 83,2.9 89.9,7.5
  rectangle net VM: 82.9,35.3 89.9,39.5
  rectangle net 3V3: 40.9,43.8 45.1,44.8
  rectangle net M2_C: 90.348,36.932 104.038,49.022
  rectangle net M2_B: 90.5,20.955 104.089,33.02
  rectangle net M2_A: 90.348,5.004 104.191,17.323
  rectangle net M_C: 6.045,36.982 19.761,49.073
  rectangle net M_B: 6.096,20.93 19.482,32.969
  rectangle net M_A: 5.918,5.004 19.71,17.043
  rectangle net PGND: 23.139,37.44 27,39.599
  rectangle net PGND: 23.165,22.2 28.296,23.52
  rectangle net PGND: 22.377,2.184 27.711,7.366
  rectangle net PGND: 82.982,30.48 86.817,32.588
  rectangle net PGND: 82.194,14.351 86.843,16.358
  rectangle net 3V3: 78.638,45.974 79.883,48.336
  rectangle net VM: 87.909,20.447 89.789,36.246
  region net 3V3: 52.97,26 52.511,26 51.359,27.153 51.359,32.059 52.97,33.67 53.6,33.039 53.6,32.38 52.97,31.749
  region: 49.9,40.6
  pour cut-out: 39.497,21.26 39.548,21.311 39.548,25.4 44.171,25.4 44.094,25.324 44.094,21.311
  pour cut-out: 30.963,53.58 31.877,53.58 33.096,52.361 33.096,50.685 31.877,49.466 30.175,49.466 28.981,50.659 28.981,52.261 30.108,53.58
  pour cut-out: 78.156,53.619 79.883,53.619 81.077,52.426 81.077,50.724 79.858,49.505 78.181,49.505 76.962,50.724 76.962,52.426
  pour cut-out: 79.832,5.537 81.051,4.318 81.051,2.642 79.832,1.422 78.156,1.422 76.937,2.642 76.937,4.318 78.156,5.537
  pour cut-out: 29.896,5.55 31.852,5.55 33.071,4.331 33.071,2.629 31.877,1.435 30.15,1.435 28.956,2.629 28.956,4.077
  pour cut-out: 76.53,23.901 76.606,23.978 82.804,23.978 82.804,22.657 76.581,22.657
  pour cut-out: 28.296,22.835 28.296,21.793 28.677,21.412 32.715,21.412 32.715,22.758 32.639,22.835
  pour cut-out: 61.341,37.948 61.366,37.922 66.345,37.922 66.345,26.365 66.142,26.162 61.417,26.162
  pour cut-out: 68.377,33.02 71.552,33.02 71.704,33.172 71.704,24.917 68.478,24.917 68.428,24.867
  region net 3V3: 57.912,26.111 57.912,24.079 59.817,24.079 59.817,25.298 59.03,26.111
  region net 3V5: 44.45,22.047 42.799,22.047 42.799,24.85 41.681,25.968 41.681,27.61 46.431,27.61 44.45,25.629
  region net 3V5: 49.835,26.01 48.717,26.01 48.097,25.39 45.248,25.39 43.624,27.013 44.704,28.092 48.006,28.092 49.835,26.264
  region net NetC1_1: 40.538,19.126 39.395,19.126 39.395,19.533 38.151,20.777 38.151,22.098 36.982,23.266 36.982,24.587 40.742,24.587 40.742,20.428 40.538,20.176
  region net VM: 42.52,18.186 39.421,18.186 39.421,18.669 39.522,18.771 40.767,18.771 41.326,19.329 49.454,19.329 51.181,17.602 51.181,17.17 54.788,13.564 54.788,5.867 54.585,5.664 49.479,5.664 47.168,7.976 47.168,17.501 47.092,17.577 44.526,17.577 44.272,17.323 44.272,14.757 42.977,14.757 42.824,14.91 42.824,17.882
Bottom Layer:
  rectangle net 3V3: 57.887,24.028 59.9,25.908
  rectangle net 3V3: 51.181,30.734 53.442,32.614
  rectangle net VM: 17.958,14.122 25.756,50.825
  rectangle net VM: 24.181,48.057 26.949,50.825
  rectangle net VM: 82.804,34.9 91.465,39.573
  rectangle net VM: 84.404,2.515 91.465,39.04
  rectangle net VM: 82.118,2.515 91.465,7.62
  rectangle net M_C: 6.071,37.109 16.078,48.87
  rectangle net M_B: 6.172,20.93 15.926,32.944
  rectangle net M_A: 6.071,4.978 16.078,16.967
  rectangle net M2_C: 94.107,37.084 104.14,48.895
  rectangle net M2_B: 94.158,21.006 103.988,32.868
  rectangle net M2_A: 94.056,5.029 104.14,17.069
  rectangle net VM: 47.244,5.842 54.762,18.288
  pour cut-out: 30.099,53.58 31.877,53.58 33.096,52.361 33.096,50.659 33.071,50.659 31.877,49.466 30.175,49.466 28.981,50.659 28.981,52.26
  pour cut-out: 78.956,53.632 79.87,53.632 81.09,52.413 81.09,50.736 79.87,49.517 78.194,49.517 76.975,50.736 76.975,52.438 78.168,53.632
  pour cut-out: 78.156,5.537 79.832,5.537 81.051,4.318 81.051,2.642 79.832,1.422 78.156,1.422 76.937,2.642 76.937,4.318
  pour cut-out: 29.879,5.55 31.826,5.55 33.071,4.305 33.071,2.705 31.801,1.435 30.124,1.435 28.931,2.629 28.931,4.072
  pour cut-out: 76.556,23.952 81.763,23.952 81.763,22.581 76.657,22.581 76.581,22.657
  pour cut-out: 28.13,22.911 32.918,22.911 32.918,21.793 32.512,21.387 28.105,21.387
  region net VM: 25.362,34.1 26.581,34.1 27.127,33.553 27.127,31.166 26.772,30.81 25.362,30.81

## Silkscreen, mask and mechanical layers (free items; w line width, h text height)
Top Overlay:
  lines w0.013: 6.006,5.006 16.006,5.006 16.006,17.006 6.006,17.006 6.006,5.006 ; 6.006,21.006 16.006,21.006 16.006,33.006 6.006,33.006 6.006,21.006 ; 6.006,37.006 16.006,37.006 16.006,49.006 6.006,49.006 6.006,37.006 ; 6.032,5.02 6.032,17.02 16.032,17.02 16.032,5.02 6.032,5.02 ; 6.032,21.02 16.032,21.02 16.032,33.02 6.032,33.02 6.032,21.02 ; 6.032,37.02 16.032,37.02 16.032,49.02 6.032,49.02 6.032,37.02 ; 50.006,47.506 50.006,52.506 60.006,52.506 60.006,47.506 50.006,47.506 ; 50.032,47.52 50.032,52.52 60.032,52.52 60.032,47.52 50.032,47.52 ; 94.006,5.006 94.006,17.006 104.006,17.006 104.006,5.006 94.006,5.006 ; 94.006,21.006 94.006,33.006 104.006,33.006 104.006,21.006 94.006,21.006 ; 94.006,37.006 94.006,49.006 104.006,49.006 104.006,37.006 94.006,37.006 ; 94.032,5.02 94.032,17.02 104.032,17.02 104.032,5.02 94.032,5.02 ; 94.032,21.02 94.032,33.02 104.032,33.02 104.032,21.02 94.032,21.02 ; 94.032,37.02 94.032,49.02 104.032,49.02 104.032,37.02 94.032,37.02
  text "A8" at 22.327,53.899 h0.76
  text "3V3" at 24.409,53.899 h0.76
  text "GND" at 19.152,53.848 h0.76
  text "G" at 68.326,53.569 h0.76
  text "S" at 70.815,53.543 h0.76
  text "3V3" at 72.669,53.543 h0.76
  text "SCK" at 52.807,52.959 h0.76
  text "CE" at 55.778,52.959 h0.76
  text "GND" at 57.76,52.959 h0.76
  text "A5" at 75.362,51.181 h0.76
  text "3V3" at 34.823,49.479 h0.76
  text "RX1" at 37.567,49.479 h0.76
  text "GND" at 42.57,49.479 h0.76
  text "TX1" at 40.03,49.454 h0.76
  text "A4" at 75.336,48.743 h0.76
  text "M_C" at 6.325,48.692 h0.76 r270
  text "3V3" at 60.452,47.447 h0.76
  text "CSN" at 55.194,46.431 h0.76
  text "MO" at 53.137,46.406 h0.76
  text "IRQ" at 50.343,46.355 h0.76
  text "M2_C" at 103.683,45.949 h0.76 r90
  text "M_C" at 6.325,39.294 h0.76 r270
  text "M2_C" at 103.632,37.313 h0.76 r90
  text "M_B" at 6.426,32.766 h0.76 r270
  text "M2_B" at 103.683,30.099 h0.76 r90
  text "M_B" at 6.401,23.317 h0.76 r270
  text "M2_B" at 103.708,21.158 h0.76 r90
  text "M_A" at 6.35,16.764 h0.76 r270
  text "M2_A" at 103.759,14.072 h0.76 r90
  text "GND" at 60.503,14.046 h0.76
  text "GND" at 47.193,13.462 h0.76
  text "+24V" at 50.851,13.411 h0.76
  text "GND" at 56.49,13.335 h0.76
  text "g" at 47.193,11.786 h0.76
  text "g" at 62.306,11.709 h0.76
  text "b" at 62.255,9.042 h0.76
  text "b" at 47.193,8.992 h0.76
  text "M_A" at 6.452,7.569 h0.76 r270
  text "y" at 47.168,6.604 h0.76
  text "y" at 62.078,6.502 h0.76
  text "M2_A" at 103.683,5.207 h0.76 r90
  text "3V3" at 47.193,3.785 h0.76
  text "3V3" at 60.198,3.708 h0.76
  text "HALL2" at 62.382,1.397 h0.76
  text "HALL" at 44.907,1.321 h0.76
  text "RST" at 75.413,0.762 h0.76
  text "BOOT" at 40.411,0.559 h0.76
Bottom Overlay:
  circle w0.013: c80.006,22.506 r5
  circle w0.013: c30.006,22.506 r5
  circle w0.013: c80.032,22.52 r5
  circle w0.013: c30.032,22.52 r5
  text "M2_C" at 103.632,49.886 h0.76 r90
  text "M_C" at 6.35,47.879 h0.76 r270
  text "M2_C" at 103.657,38.684 h0.76 r90
  text "M_C" at 6.35,36.297 h0.76 r270
  text "M2_B" at 103.657,34.036 h0.76 r90
  text "M_B" at 6.502,31.648 h0.76 r270
  text "M2_B" at 103.784,22.504 h0.76 r90
  text "M_B" at 6.401,20.574 h0.76 r270
  text "M2_A" at 103.759,17.831 h0.76 r90
  text "M_A" at 6.325,15.773 h0.76 r270
  text "M2_A" at 103.607,7.087 h0.76 r90
  text "GND" at 55.956,5.69 h0.76 r180
  text "+24V" at 54.305,5.004 h0.76
  text "M_A" at 6.248,4.064 h0.76 r270
Mechanical 1:
  the board outline again, w0.013

## Text inside footprints (layer, text, board x,y; h text height)
NRF1: Top Overlay "MISO" at 49.454,52.959 h0.76